# EAGLE board TRV_CC110x (EAGLE 6.4)
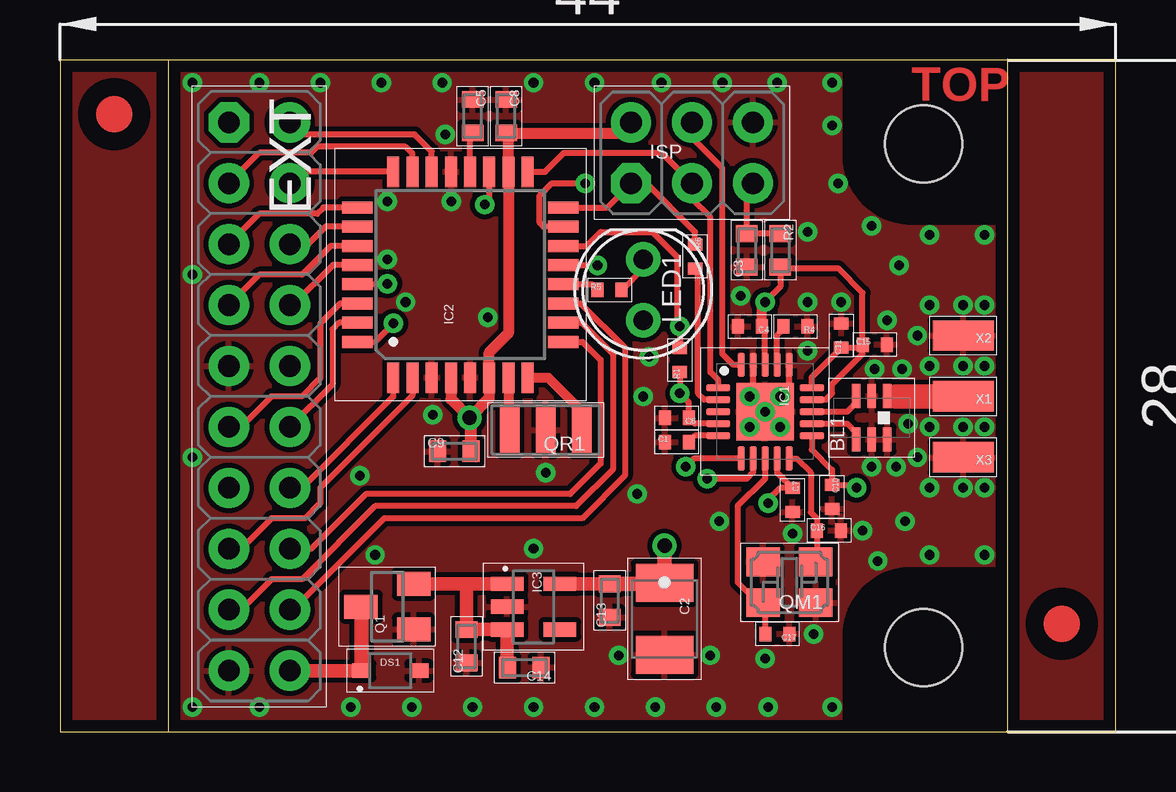
[diagram p0: board, top side]
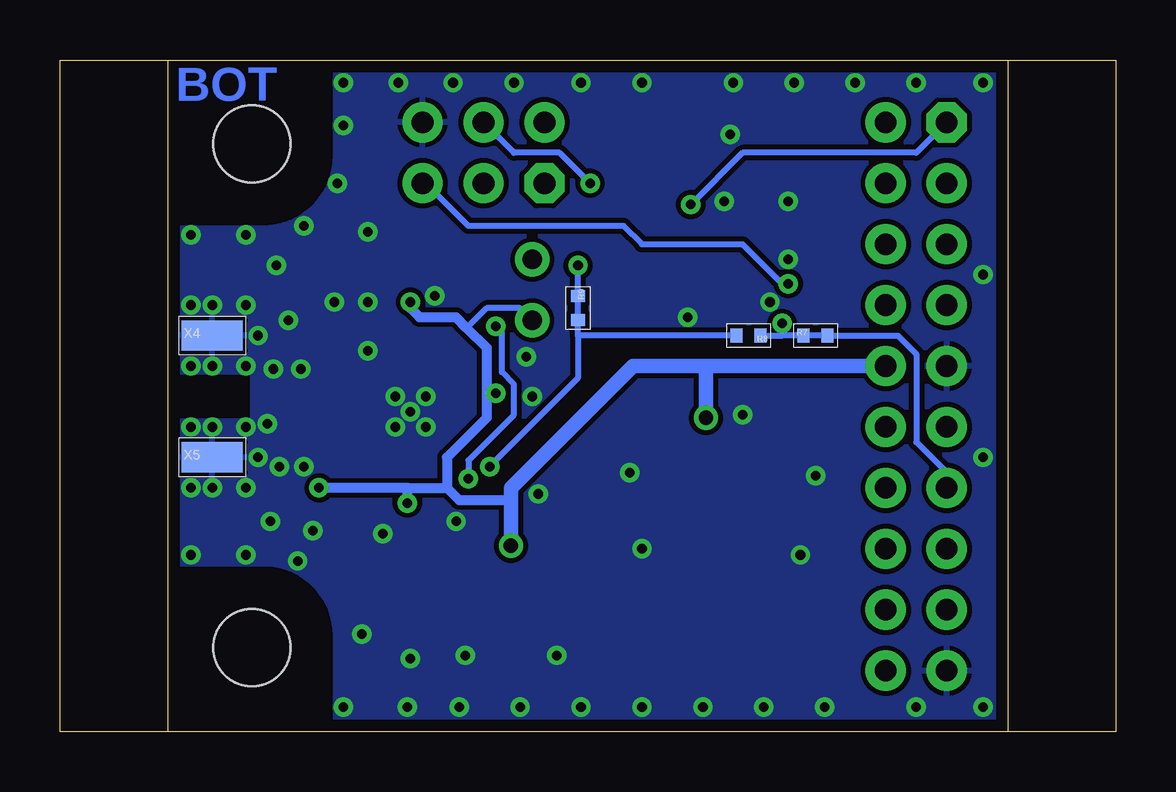
[diagram p1: board, bottom side, seen from below]

Size 44 x 28 mm. Coordinates in mm from the lower left corner, seen from the top.
Outline: 4.5,0 39.5,0
Outline: 39.5,0 39.5,28
Outline: 39.5,28 4.5,28
Outline: 4.5,28 4.5,0
Outline: 4.5,28 0,28 0,0 4.5,0
Outline: 39.5,0 44,0 44,28 39.5,28
Copper layers (1*16): Top 0.035mm / dielectric 1.5mm / Bottom 0.035mm
Design rules "default *": minimum track width 10mil, minimum drill 0.4mm, track to track 8mil, track to pad 8mil, pad to pad 8mil, via to via 8mil, smd to smd 8mil, copper to edge 0.5mm, drill to drill 8mil, minimum pad ring 8mil, minimum via ring 8mil, stop-mask expansion 2mil, vias tented up to drill 25mil, thermal gap 8mil
Holes 3.2 mm at 36,24.5 36,3.5

## Footprints (pad centres in the part's own frame; a part is rotated, then mirrored left to right if it is on the bottom)
BL = smd 1 x 0.35: 1 0.9,-0.65; 2 0.9,0; 3 0.9,0.65; 4 -0.9,0.65; 5 -0.9,0; 6 -0.9,-0.65
0402 = smd 0.5 x 0.6: 1 -0.5,0; 2 0.5,0
SMC_B = smd 1.6 x 2.4: + -1.5,0; - 1.5,0
0603 = smd 0.7 x 0.9: 1 -0.697,0; 2 0.697,0
SOD323 = smd 0.8 x 0.6: A 1.2,0; C -1.2,0
ML20S = drill 0.9 pad 1.676 octagon: 1 -11.43,-1.27 | drill 0.9 pad 1.676: 2 -11.43,1.27; 3 -8.89,-1.27; 4 -8.89,1.27; 5 -6.35,-1.27; 6 -6.35,1.27; 7 -3.81,-1.27; 8 -3.81,1.27; 9 -1.27,-1.27; 10 -1.27,1.27; 11 1.27,-1.27; 12 1.27,1.27; 13 3.81,-1.27; 14 3.81,1.27; 15 6.35,-1.27; 16 6.35,1.27; 17 8.89,-1.27; 18 8.89,1.27; 19 11.43,-1.27; 20 11.43,1.27
VQFN20 = smd 0.28 x 1: -1 -1,-1.95; -2 -0.5,-1.95; -3 0,-1.95; -4 0.5,-1.95; -5 1,-1.95; -11 1,1.95; -12 0.5,1.95; -13 0,1.95; -14 -0.5,1.95; -15 -1,1.95 | smd 1 x 0.28: -6 1.95,-1; -7 1.95,-0.5; -8 1.95,0; -9 1.95,0.5; -10 1.95,1; -16 -1.95,1; -17 -1.95,0.5; -18 -1.95,0; -19 -1.95,-0.5; -20 -1.95,-1 | smd 2.4 x 2.4: P 0,0
TQFP32-08 = smd 1.27 x 0.5: 1 -4.293,2.8; 2 -4.293,2; 3 -4.293,1.2; 4 -4.293,0.4; 5 -4.293,-0.4; 6 -4.293,-1.2; 7 -4.293,-2; 8 -4.293,-2.8; 17 4.293,-2.8; 18 4.293,-2; 19 4.293,-1.2; 20 4.293,-0.4; 21 4.293,0.4; 22 4.293,1.2; 23 4.293,2; 24 4.293,2.8 | smd 0.5 x 1.27: 9 -2.8,-4.293; 10 -2,-4.293; 11 -1.2,-4.293; 12 -0.4,-4.293; 13 0.4,-4.293; 14 1.2,-4.293; 15 2,-4.293; 16 2.8,-4.293; 25 2.8,4.293; 26 2,4.293; 27 1.2,4.293; 28 0.4,4.293; 29 -0.4,4.293; 30 -1.2,4.293; 31 -2,4.293; 32 -2.8,4.293
SOT23-5 = smd 0.6 x 1.35: 1 -0.95,-1.101; 2 0,-1.101; 3 0.95,-1.101; 4 0.95,1.101; 5 -0.951,1.101
ML6S = drill 0.9 pad 1.676 octagon: 1 -2.54,-1.27 | drill 0.9 pad 1.676: 2 -2.54,1.27; 3 0,-1.27; 4 0,1.27; 5 2.54,-1.27; 6 2.54,1.27
T1-3/4 = drill 0.8 pad 1.422: A 1.27,0; C -1.27,0
SOT23 = smd 1 x 1.4: 1 -0.95,-1.1; 2 0.95,-1.1; 3 0,1.1
SMD_4P_3.2X2.5 = smd 1.4 x 1.2: 1 -1.1,-0.85; 2 1.1,-0.85; 3 1.1,0.85; 4 -1.1,0.85
CR = smd 0.8 x 2: 1 -1.5,0; 2 1.5,0; M 0,0
S2.54/1.27 = smd 1.27 x 2.54: 1 0,0

## Placement (x,y rotation side)
BL1  089BM15A0001  [BL]  33.84,13.08 90 top
C1  100n  [0402]  25.71,12.06 0 top
C2  10u  [SMC_B]  25.2,4.7 270 top
C3  100n  [0603]  28.63,20.07 90 top
C4  220p  [0402]  28.76,16.89 180 top
C5  100n  [0603]  17.2,25.65 270 top
C6  100n  [0402]  25.71,13.08 180 top
C7  10n  [0402]  30.54,9.65 270 top
C8  100n  [0603]  18.6,25.65 270 top
C9  100n  [0603]  16.44,11.68 0 top
C10  2p2  [0402]  32.19,9.78 270 top
C11  220p  [0402]  32.57,16.51 90 top
C12  1u  [0603]  16.95,3.56 90 top
C13  1u  [0603]  22.91,5.46 90 top
C14  100n  [0603]  19.36,2.67 180 top
C15  10n  [0402]  33.96,16.13 0 top
C16  27p  [0402]  32.06,8.38 0 top
C17  27p  [0402]  29.9,4.06 180 top
DS1  PESD12VL1BA  [SOD323]  13.77,2.54 0 top
EXT  EXT  [ML20S]  8.31,13.97 270 top
IC1  [VQFN20]  29.39,13.34 270 top
IC2  MEGA328P-AU  [TQFP32-08]  16.69,19.05 90 top
IC3  LP2992-IM5-3.3  [SOT23-5]  19.74,5.21 270 top
ISP  ISP  [ML6S]  26.34,24.13 0 top
LED1  LEDR  [T1-3/4]  24.31,18.41 270 top
Q1  IRLML9301  [SOT23]  13.64,5.21 90 top
QM1  26M  [SMD_4P_3.2X2.5]  30.41,6.22 180 top
QR1  8M  [CR]  20.25,12.57 180 top
R1  10k  [0402]  25.84,15.49 90 top
R2  10k  [0603]  30.03,20.07 270 top
R4  56k  [0402]  30.66,16.89 180 top
R5  330R  [0402]  22.91,18.41 0 top
R6  330R  [0402]  26.47,19.81 270 top
R7  [0402]  12.5,16.51 0 bottom
R8  [0402]  15.29,16.51 180 bottom
R9  [0402]  22.41,17.65 270 bottom
U$3  [FUICIDAL1.5R]  41.75,4.5 0 top
U$4  [FUICIDAL1.5R]  2.25,25.75 0 top
X1  ANT  [S2.54/1.27]  37.65,13.97 90 top
X2  GND  [S2.54/1.27]  37.65,16.51 90 top
X3  GND  [S2.54/1.27]  37.65,11.43 90 top
X4  GND  [S2.54/1.27]  37.65,16.51 270 bottom
X5  GND  [S2.54/1.27]  37.65,11.43 270 bottom

## Library data of the parts
BL1 IC1 = RF
C1-C17 R1 R2 R4-R9 = RCL
DS1 = Diode
EXT ISP X1-X5 = Conn
IC2 = atmel
IC3 = DCDC
LED1 = Optic
Q1 = Transistor
QM1 QR1 = QUARTZ
U$3 U$4 = Other

## Nets
+3V3: C2.+ C4.1 C6.1 C7.1 C8.2 C9.2 C10.1 C11.1 C13.2 C15.1 EXT.10 IC1.-4 IC1.-9 IC1.-11 IC1.-14 IC1.-15 IC1.-18 IC2.4 IC2.6 IC2.18 IC3.5 ISP.2 LED1.A R1.1 R2.2
GND: BL1.2 BL1.5 BL1.6 C1.1 C2.- C3.1 C4.2 C5.1 C6.2 C7.2 C8.1 C9.1 C10.2 C11.2 C12.1 C13.1 C14.1 C15.2 C16.2 C17.1 DS1.A EXT.9 EXT.19 IC1.-16 IC1.-19 IC1.P IC2.3 IC2.5 IC2.21 IC3.2 ISP.6 Q1.1 QM1.2 QM1.4 QR1.M R4.1 X2.1 X3.1 X4.1 X5.1
MISO: IC2.16 ISP.1 R6.1
MOSI: IC1.-20 IC2.15 ISP.4
N$1: C1.2 IC1.-5
N$2: IC1.-17 R4.2
N$3: EXT.2 IC2.22
N$4: IC1.-2 R6.2
N$5: DS1.C EXT.20 Q1.3
N$6: C5.2 IC2.20
N$7: IC2.8 QR1.1
N$8: IC2.7 QR1.2
N$10: IC2.12 R5.1
N$11: EXT.13 IC2.32 R7.1 R7.2 R8.1
N$12: C12.2 C14.2 IC3.1 IC3.3 Q1.2
N$13: BL1.3 IC1.-13
N$14: BL1.4 IC1.-12
N$15: EXT.1 IC2.19
N$16: BL1.1 X1.1
N$17: C17.2 IC1.-8 QM1.3
N$18: C16.1 IC1.-10 QM1.1
N$21: LED1.C R5.2
PC0: EXT.3 IC2.23
PC1: EXT.4 IC2.24
PC2: EXT.5 IC2.25
PC3: EXT.6 IC2.26
PC4: EXT.7 IC2.27
PC5: EXT.8 IC2.28
PD3: EXT.14 IC2.1
PD4: EXT.15 IC2.2
PD5: EXT.16 IC2.9
PD6: EXT.17 IC2.10
PD7: EXT.18 IC2.11
RIRQ: IC1.-6 IC2.13 R8.2 R9.1 R9.2
RSEL: IC1.-7 IC2.14 R1.2
RST: C3.2 IC2.29 ISP.5 R2.1
RXD: EXT.11 IC2.30
SCK: IC1.-1 IC2.17 ISP.3
TXD: EXT.12 IC2.31

## Tracks (layer width: path | path; a pad name or v marks a point on that pad's centre or on a via)
+3V3  (via drill 0.4, 0.6)
  Top 0.254: IC1.-4 26.45,12.84 C6.1 26.21,13.72 v25.84,14.1 R1.1 | IC1.-18 29.39,16.76 C4.1 | IC1.-14 31.92,13.84 32.19,14.1 32.19,14.48 33.46,15.75 C15.1 | IC1.-11 31.34,11.76 32.19,10.91 C10.1 33.08,10.28 v33.2,10.16 | v29.52,9.53 29.52,9.65 30.02,10.15 C7.1 29.89,10.79 IC1.-9 | v29.39,17.91 30.03,18.54 R2.2 30.09,19.3 32.44,19.3 33.46,18.29 C15.1 | C15.1 33.34,16.01 C11.1 31.34,14.78 IC1.-15 | C15.1
  Top 0.406: C4.1 29.26,17.77 v29.39,17.91
  Top 0.457: ISP.2 23.36,24.96 C8.2 18.69,24.86 IC2.18 18.69,16.61 17.89,15.8 IC2.6 17.89,13.9 v17.07,13.08 16.29,13.86 IC2.4
  Top 0.508: C9.2 17.13,13.02 v17.07,13.08
  Top 0.559: IC3.5 C13.2
  Top 0.61: C13.2 25.16,6.16 C2.+ v25.2,7.75
  Bottom 0.254: 27.04,16.83 26.22,17.65 24.82,17.65 LED1.A
  Bottom 0.406: v25.84,14.1 26.22,14.1 | 29.52,10.16 v33.2,10.16 | v29.52,9.53 29.52,10.16 | 26.22,14.1 C6.1 27.87,11.43 27.87,10.16 | 27.87,10.16 27.36,9.65 25.2,9.65 | 29.52,10.16 27.87,10.16 | v29.39,17.91 29.39,17.65 29.01,17.27 27.49,17.27 27.04,16.83 26.22,16 26.22,14.1
  Bottom 0.61: 17.07,15.24 EXT.10 | v17.07,13.08 17.07,15.24 | 17.07,15.24 20.12,15.24 25.2,10.16 25.2,9.65 v25.2,7.75
GND  (via drill 0.4, 0.4 pad 0.61)
  Top 0.254: IC1.-19 28.89,13.84 IC1.P | IC1.-16 30.39,14.49
  other vias: 33.84,11.05 28.38,18.16 29.39,13.34 28.76,13.97 30.03,13.97 28.76,12.7 30.03,12.7 36.25,12.7 37.65,12.7 38.54,12.7 38.54,15.24 37.65,15.24 36.25,15.24 37.65,17.78 38.54,17.78 38.54,20.7 31.17,15.88 31.17,17.91 32.44,22.86 32.57,17.91 35.74,16.51 36.25,20.7 38.54,10.16 37.65,10.16 36.25,10.16 35.74,11.43 35.23,8.76 33.46,8.38 30.54,8.26 32.19,27.05 29.9,27.05 27.61,27.05 25.07,27.05 22.28,27.05 19.74,27.05 15.93,27.05 16.06,24.89 13.39,27.05 10.85,27.05 8.31,27.05 5.52,27.05 5.52,19.05 5.52,11.43 5.52,1.02 38.54,7.37 36.25,7.37 34.09,7.11 31.42,4.06 29.39,3.05 29.52,1.02 27.36,1.02 24.82,1.02 19.74,1.02 17.2,1.02 14.66,1.02 12.12,1.02 8.31,1.02 27.11,3.17 19.74,7.62 13.14,7.37 12.5,10.67 15.55,13.21 20.25,10.79 17.84,17.27 14.41,17.91 16.31,22.1 13.64,22.1 13.64,19.68 32.19,1.02 23.3,3.17 22.28,1.02 32.19,25.27 33.96,15.11 35.11,15.11 36.25,17.78 35.36,12.83 33.84,21.08 24.06,9.91 27.49,8.76 31.17,20.83 34.98,19.43 34.85,11.05 34.47,17.14 24.31,13.97 24.57,15.62
  pour Top: 4.5,0 32.5,0 32.5,4 arc-90 35.5,7 39.5,7 39.5,21 35.5,21 arc-90 32.5,24 32.5,28 4.5,28
  pour Bottom: 4.5,0 32.5,0 32.5,4 arc-90 35.5,7 39.5,7 39.5,12.95 35.95,12.95 35.95,14.99 39.5,14.99 39.5,21 35.5,21 arc-90 32.5,24 32.5,28 4.5,28
MISO
  Top 0.254: R6.1 26.47,20.83 24.44,22.86 ISP.1 22.79,21.85 IC2.16
MOSI  (via drill 0.4)
  Top 0.254: ISP.4 26.34,24.77 27.61,23.5 27.61,15.75 28.08,15.29 IC1.-20 | IC2.15 20.15,21.05 19.99,21.21 19.99,22.35 20.5,22.86 v21.9,22.86
  Bottom 0.254: v21.9,22.86 23.17,24.13 25.07,24.13 ISP.4
N$1
  Top 0.254: IC1.-5 26.48,12.34 C1.2
N$2
  Top 0.254: IC1.-17 29.89,16.5 30.15,16.76 R4.2
N$3
  Top 0.254: IC2.22 15.49,24.19 14.79,24.89 10.09,24.89 EXT.2
N$4
  Top 0.254: IC1.-2 26.86,13.84 26.6,14.1 26.6,19.18 R6.2
N$5
  Top 0.559: EXT.20 DS1.C
  Top 0.61: DS1.C 12.57,5.18 Q1.3
N$6
  Top 0.254: IC2.20 17.09,24.85 C5.2
N$7
  Top 0.406: IC2.8 20.35,14.76 21.64,13.46 21.64,12.68 QR1.1
N$8
  Top 0.406: IC2.7 18.69,12.63 QR1.2
N$9
  pour Top: 0,0 0,28 4.5,28 4.5,0
N$10
  Top 0.254: IC2.12 22.18,18.65 R5.1
N$11  (via drill 0.4)
  Top 0.254: IC2.32 13.13,16.25 v13.9,17.02
  Bottom 0.254: EXT.13 7.04,10.79 8.31,12.06 8.31,15.75 9.07,16.51 R7.2 R7.1 13.9,16.51 | R8.1 13.9,16.51 | 13.9,16.51 v13.9,17.02
N$12
  Top 0.559: IC3.1 16.95,6.16 | 16.95,6.16 Q1.2 | Q1.2 | 16.95,6.16 C12.2 IC3.3 18.64,2.69 C14.2
N$13
  Top 0.254: IC1.-13 32.82,13.34 33.2,13.72 33.2,13.97 BL1.3
N$14
  Top 0.254: IC1.-12 32.81,12.84 33.2,12.45 33.2,12.2 BL1.4
N$15  (via drill 0.4)
  Top 0.254: IC2.19 17.89,22.16 v17.71,21.97
  Bottom 0.254: EXT.1 8.31,24.13 15.55,24.13 v17.71,21.97
N$16
  Top 0.254: BL1.1 34.84,13.98 34.85,13.97
  Top 1.016: 34.85,13.97 X1.1
N$17
  Top 0.254: IC1.-8 29.39,10.54 28.25,9.4 28.25,6.22 29.14,5.33 29.27,5.33 | 29.27,5.33 QM1.3 | C17.2 29.4,5.2 29.27,5.33
N$18
  Top 0.254: IC1.-10 30.71,11.38 31.3,10.79 31.3,9.14 31.55,8.89 C16.1 | C16.1 | C16.1 31.55,7.12 QM1.1
N$19
  pour Top: 39.5,0 44,0 44,28 39.5,28
N$21
  Top 0.254: R5.2 23.42,18.41 24.31,19.3 LED1.C
PC0
  Top 0.254: IC2.23 14.69,24.1 14.41,24.38 10.72,24.38 10.47,24.13 8.31,24.13 EXT.3
PC1
  Top 0.254: IC2.24 10.06,23.34 EXT.4
PC2
  Top 0.254: IC2.25 10.98,21.85 10.72,21.59 8.31,21.59 EXT.5
PC3
  Top 0.254: IC2.26 11.07,21.05 10.34,20.32 EXT.6
PC4
  Top 0.254: IC2.27 11.29,20.25 10.09,19.05 8.31,19.05 EXT.7
PC5
  Top 0.254: IC2.28 11.38,19.45 9.71,17.78 EXT.8
PD3
  Top 0.254: IC2.1 13.89,13.96 10.09,10.16 EXT.14
PD4
  Top 0.254: EXT.15 7.55,7.62 8.82,8.89 10.21,8.89 10.85,9.53 10.85,10.16 14.69,14 IC2.2
PD5
  Top 0.254: IC2.9 21.78,16.25 22.53,15.49 22.53,11.18 21.26,9.91 12.76,9.91 10.47,7.62 EXT.16
PD6
  Top 0.254: IC2.10 21.74,17.05 23.04,15.75 23.04,10.92 21.52,9.4 13.14,9.4 10.09,6.35 8.82,6.35 7.55,5.08 EXT.17
PD7
  Top 0.254: IC2.11 21.7,17.85 23.55,16 23.55,10.67 21.77,8.89 13.52,8.89 9.71,5.08 EXT.18
RIRQ  (via drill 0.4)
  Top 0.254: IC1.-6 26.43,11.38 v26.09,11.05 | IC2.13 22.39,19.45 v22.41,19.43
  Bottom 0.254: v22.41,19.43 R9.1 R9.2 22.41,16.51 | 22.41,16.51 22.41,14.73 v26.09,11.05 | R8.2 22.41,16.51
RSEL  (via drill 0.4)
  Top 0.254: IC1.-7 28.89,10.8 28.63,10.54 v26.98,10.54 | R1.2 v25.84,16.89 25.71,17.02 25.71,19.81 24.69,20.83 22.53,20.83 21.96,20.25 IC2.14
  Bottom 0.254: v26.98,10.54 26.98,11.3 25.07,13.21 25.07,14.48 25.58,14.99 25.58,16.64 v25.84,16.89
RST  (via drill 0.4)
  Top 0.254: IC2.29 13.62,18.65 v13.64,18.67 | R2.1 C3.2 28.63,22.61 ISP.5
  Bottom 0.254: v13.64,18.67 13.9,18.67 15.55,20.32 19.74,20.32 20.5,21.08 26.98,21.08 28.76,22.86 ISP.5
RXD
  Top 0.254: EXT.11 7.55,12.7 8.82,13.97 10.09,13.97 10.85,14.73 10.85,17.02 11.68,17.85 IC2.30
SCK
  Top 0.254: IC1.-1 27.44,14.65 27.11,14.99 27.11,21.46 26.34,22.23 ISP.3 25.07,24.13 21.01,24.13 20.22,23.34 IC2.17
TXD
  Top 0.254: IC2.31 11.64,17.05 11.36,16.76 11.36,14.48 EXT.12

## Text on the board
Top: TOP
Bottom: BOT
Document: ISP | K | 3V3 | UP20 | X13Home.org | +